# EAGLE board senderNode_tiny84 (EAGLE 6.6.0)
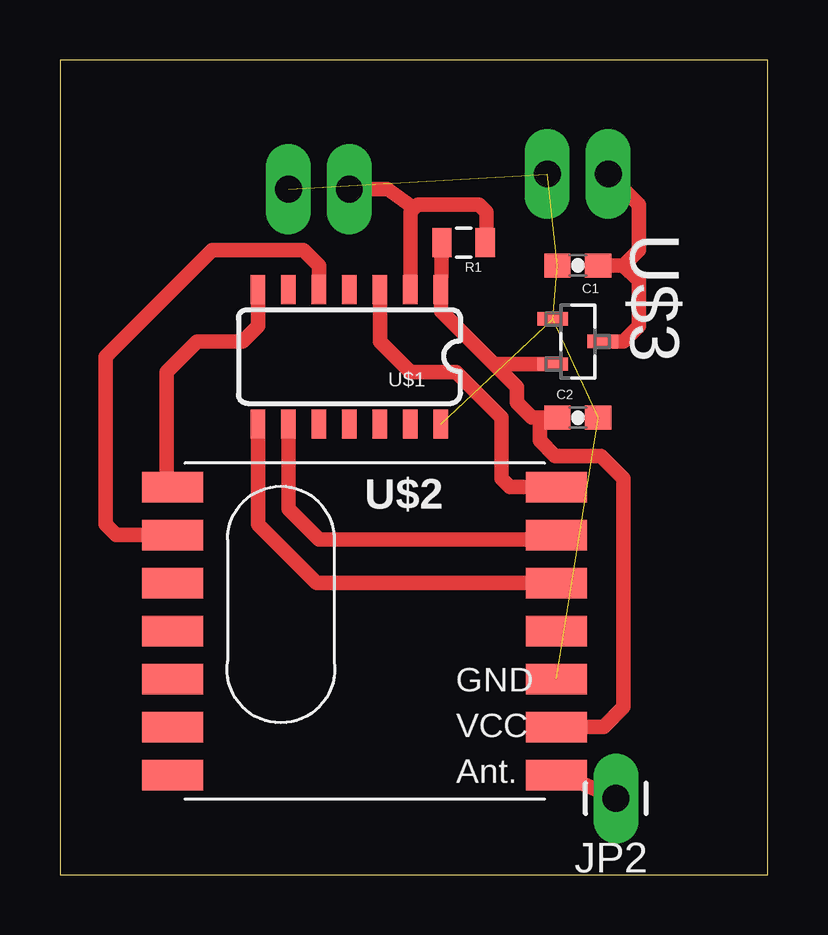
[diagram p0: board, top side]

Size 29.52 x 33.96 mm. Coordinates in mm from the lower left corner, seen from the top.
Outline: 0,0 29.52,0 29.52,33.96 0,33.96 0,0
Copper layers (1*16): Top 0.035mm / dielectric 1.5mm / Bottom 0.035mm
Design rules "default": minimum track width 10mil, minimum drill 24mil, track to track 8mil, track to pad 8mil, pad to pad 8mil, via to via 8mil, smd to smd 8mil, copper to edge 40mil, drill to drill 8mil, minimum pad ring 10mil, minimum via ring 8mil, stop-mask expansion 4mil, vias tented up to drill 0mil, thermal gap 10mil

## Footprints (pad centres in the part's own frame; a part is rotated, then mirrored left to right if it is on the bottom)
0603-CAP = smd 1.1 x 1: 1 -0.85,0; 2 0.85,0
1X02_LONGPADS = drill 1.118 pad 1.88 long: 1 0,0; 2 2.54,0
1X01_LONGPAD = drill 1.118 pad 1.88 long: 1 0,0
0805 = smd 0.8 x 1.2: 1 -0.9,0; 2 0.9,0
SO14 = smd 0.6 x 1.2: 1 -3.81,-2.8; 2 -2.54,-2.8; 3 -1.27,-2.8; 4 0,-2.8; 5 1.27,-2.8; 6 2.54,-2.8; 7 3.81,-2.8; 8 3.81,2.8; 9 2.54,2.8; 10 1.27,2.8; 11 0,2.8; 12 -1.27,2.8; 13 -2.54,2.8; 14 -3.81,2.8
RFM12B = smd 2.54 x 1.27: ANT 8,-6; FFS -8,2; GND 8,-2; IRQ -8,4; P$8 -8,0; P$9 -8,-2; P$10 -8,-4; P$12 -8,-6; P$16 8,0; SCK 8,4; SDI 8,2; SDO -8,6; SEL 8,6; VDD 8,-4
SOT95P237X112-3N = smd 0.559 x 1.27: 1 -0.94,-1.041; 2 0.94,-1.041; 3 0,1.041

## Placement (x,y rotation side)
C1  10uF  [0603-CAP]  21.59,25.4 180 top
C2  10uF  [0603-CAP]  21.59,19.05 0 top
JP1  M02PTH3  [1X02_LONGPADS]  20.32,29.21 0 top
JP2  M01PTH_LONGPAD  [1X01_LONGPAD]  23.18,3.17 180 top
JP3  Themistor  [1X02_LONGPADS]  9.53,28.57 0 top
R1  10k  [0805]  16.83,26.35 180 top
U$1  ATTINY84  [SO14]  12.06,21.59 180 top
U$2  RFM12B  [RFM12B]  12.7,10.16 0 top
U$3  MCP1700T-3002E/TT  [SOT95P237X112-3N]  21.59,22.23 270 top

## Library data of the parts
C1 C2 = SparkFun-Capacitors; PROD_ID: CAP-11015
JP1-JP3 = SparkFun-Connectors
R1 = SparkFun-Resistors
U$1 = SparkFun-DigitalIC
U$2 = JeeParts
U$3 = Microchip_By_element14_Batch_1; MPN: MCP1700T-3002E/TT; OC_FARNELL: 1331482; OC_NEWARK: 84R5176; PACKAGE: SOT23-3; SUPPLIER: Microchip

## Nets
GND: C1.2 C2.2 JP1.1 JP3.1 U$1.14 U$2.GND U$3.1
N$1: U$1.5 U$2.IRQ
N$2: U$1.7 U$2.SDO
N$3: U$1.8 U$2.SDI
N$4: U$1.9 U$2.SCK
N$5: U$1.3 U$2.SEL
N$6: C1.1 JP1.2 U$3.3
N$9: JP3.2 R1.1 U$1.2
N$10: JP2.1 U$2.ANT
VCC: C2.1 R1.2 U$1.1 U$2.VDD U$3.2

## Tracks (layer width: path | path; a pad name or v marks a point on that pad's centre or on a via)
GND  (6 unrouted)
N$1
  Top 0.61: U$2.IRQ 2.35,14.16 1.91,14.61 1.91,21.59 6.35,26.04 10.16,26.04 10.79,25.4 U$1.5
N$2
  Top 0.61: U$1.7 8.26,22.86 7.62,22.23 5.71,22.23 4.45,20.95 4.45,16.41 U$2.SDO
N$3
  Top 0.61: U$2.SDI 10.7,12.16 8.26,14.61 U$1.8
N$4
  Top 0.61: U$2.SCK 20.51,13.97 10.79,13.97 9.53,15.24 U$1.9
N$5
  Top 0.61: U$2.SEL 18.77,16.16 18.41,16.51 18.41,19.05 16.51,20.95 14.61,20.95 13.34,22.23 U$1.3
N$6
  Top 0.61: U$3.3 23.5,22.23 24.13,22.86 24.13,24.77 23.5,25.4 | C1.1 23.5,25.4 | 23.5,25.4 24.13,26.04 24.13,27.94 JP1.2
N$9
  Top 0.61: U$1.2 14.61,27.62 14.76,27.78 | 14.76,27.78 14.92,27.94 17.46,27.94 17.78,27.62 17.78,26.41 R1.1 | JP3.2 13.65,28.57 14.76,27.78
N$10
  Top 0.61: U$2.ANT 20.95,4.16 JP2.1
VCC
  Top 0.61: R1.2 U$1.1 15.88,23.5 18.09,21.29 | U$3.2 18.09,21.29 | C2.1 20,19.05 | 20,19.05 19.68,19.05 19.05,19.68 19.05,20.32 18.09,21.29 | U$2.VDD 22.67,6.16 23.5,6.99 23.5,16.51 22.54,17.46 20.64,17.46 20,18.1 20,19.05